# Altium PCB Booster_Common_Channel_RF.PcbDoc (part 2 of 3)
Units mm, origin at the board's own origin, x right, y up, seen from the top; angles counter-clockwise.
Board outline 159.2 x 28.7 mm, 2 copper layers (Top Layer, Bottom Layer), stack 1.071 mm thick; 192 components, 112 nets, 503 pads, 510 vias.
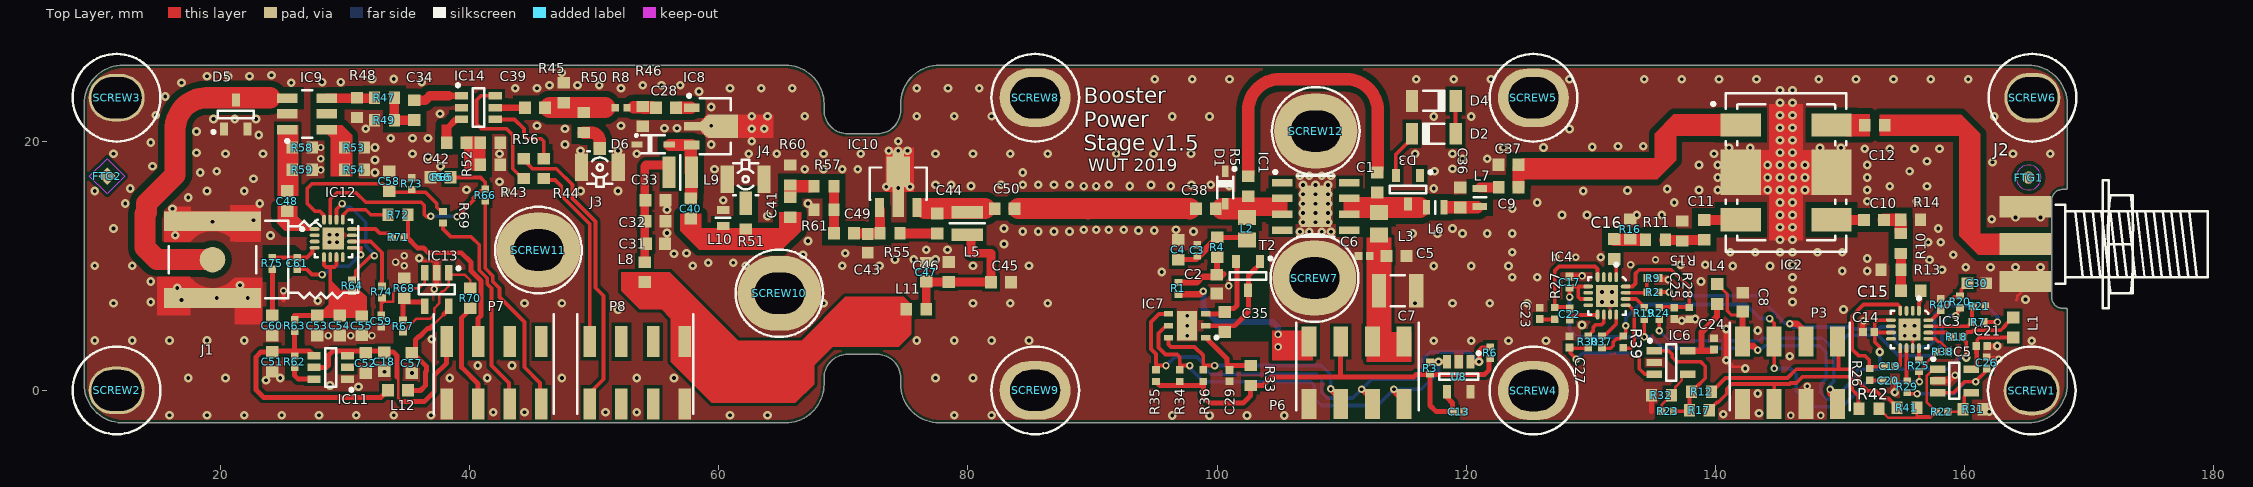
[diagram p0: Top Layer view]

## Part data (continued)
R1 R2 R7 R8 R9 R20 R21 R24 R25 R29 R30 R37 R38 R39 R40 R63 R65 R66 R69 R71 R74 R75: library part R0402_0R_JUMPER, "Resistor", Case=0402, Manufacturer=GENERIC, Manufacturer1 ComponentHeight=0.4mm, Manufacturer1 Example="YAGEO PHYCOMP", Manufacturer1 Part Number=232270591001L, Author="CERN DEM JLC", Component Type=Standard, CreateDate=03.12.2007, HelpURL=\\cern.ch\dfs\Applications\Altium\Datasheets\R0402_Phycomp_RC0402.pdf, LatestRevisionDate=17.10.2012, Manufacturer Part Number=R0402_0R_JUMPER, Mounted=Yes, Part Description="1A (0.05R Max DC Resistance) Zero Ohm Jumper", Part Number=R0402_0R_JUMPER, Pin Count=2, PressFit=No, Sense=No, SMD=Yes, Socket=No, Status="Not Recommended"
R3 R6 R18 R19 R22 R23 R28 R34 R35 R36 R62 R64 R67 R73: library part R0402_10k_1%_0.0625W_100PPM, "Resistor - 1%", Case=0402, Manufacturer=GENERIC, Manufacturer1 ComponentHeight=0.4mm, Manufacturer1 Example="YAGEO PHYCOMP", Manufacturer1 Part Number=232270671003L, Manufacturer Part Number=R0402_10K_1%_0.0625W_100PPM, Power=0.0625W, Tolerance=±1%, Author="CERN DEM JLC", Component Type=Standard, CreateDate=03.12.2007, HelpURL=\\cern.ch\dfs\Applications\Altium\Datasheets\R0402_Phycomp_RC0402.pdf, LatestRevisionDate=17.10.2012, Mounted=Yes, Part Description="General Purpose Thick Film Chip Resistor", Part Number=R0402_10K_1%_0.0625W_100PPM, Pin Count=2, PressFit=No, Sense=No, SMD=Yes, Socket=No, Status="Not Recommended", TC=±100ppm/°C
R4 R33: library part R0603_39R_1%_0.1W_100PPM, "Resistor - 1%", Case=0603, Manufacturer=GENERIC, Manufacturer1 ComponentHeight=0.55mm, Manufacturer1 Example="NIC COMPONENT", Manufacturer1 Part Number=NRC06F39R0TRF, Power=0.1W, Tolerance=±1%, Author="CERN DEM JLC", Component Type=Standard, CreateDate=03.12.2007, HelpURL=\\cern.ch\dfs\Applications\Altium\Datasheets\R0603_NIC_NRC.pdf, LatestRevisionDate=13.03.2008, Manufacturer Part Number=R0603_39R_1%_0.1W_100PPM, Mounted=Yes, Part Description="General Purpose Thick Film Chip Resistor", Part Number=R0603_39R_1%_0.1W_100PPM, Pin Count=2, PressFit=No, Sense=No, SMD=Yes, Socket=No, Status=Preferred, TC=±100ppm/°C
R5: library part R0603_750R_1%_0.1W_100PPM, "Resistor - 1%", Case=0603, Manufacturer=GENERIC, Manufacturer1 ComponentHeight=0.55mm, Manufacturer1 Example="NIC COMPONENT", Manufacturer1 Part Number=NRC06F7500TRF, Power=0.1W, Tolerance=±1%, Author="CERN DEM JLC", Component Type=Standard, CreateDate=03.12.2007, HelpURL=\\cern.ch\dfs\Applications\Altium\Datasheets\R0603_NIC_NRC.pdf, LatestRevisionDate=13.03.2008, Manufacturer Part Number=R0603_750R_1%_0.1W_100PPM, Mounted=Yes, Part Description="General Purpose Thick Film Chip Resistor", Part Number=R0603_750R_1%_0.1W_100PPM, Pin Count=2, PressFit=No, Sense=No, SMD=Yes, Socket=No, Status=Preferred, TC=±100ppm/°C
R10 R11: library part R0603_71R5_1%_0.1W_100PPM, "Resistor - 1%", Case=0603, Manufacturer=GENERIC, Manufacturer1 ComponentHeight=0.50mm, Manufacturer1 Example=VISHAY, Manufacturer1 Part Number=CRCW060371R5FKEA, Power=0.1W, Tolerance=±1%, Author="CERN DEM JLC", Component Type=Standard, CreateDate=11.12.2013, HelpURL="\\cern.ch\dfs\Applications\Altium\Datasheets\R0603_VISHAY_CRCW e3.pdf", LatestRevisionDate=11.12.2013, Manufacturer Part Number=R0603_71R5_1%_0.1W_100PPM, Mounted=Yes, Part Description="General Purpose Thick Film Chip Resistor", Part Number=R0603_71R5_1%_0.1W_100PPM, Pin Count=2, PressFit=No, Sense=No, SMD=Yes, Socket=No, Status=Preferred, TC=±100ppm/°C
R12 R42 R45 R46 R50 R51 R72: library part R0603_NO-VALUE, "Resistor", Case=0603, Author="CERN DEM JLC", Component Type=Standard, CreateDate=03.12.2007, HelpURL=Undefined, LatestRevisionDate=13.03.2008, Manufacturer=Undefined, Manufacturer1 ComponentHeight=Undefined, Manufacturer1 Example=Undefined, Manufacturer1 Part Number=Undefined, Manufacturer Part Number=R0603_NO-VALUE, Mounted=No, Part Description="Reserved Footprint For a 0603 (1608) Chip Resistor", Part Number=R0603_NO-VALUE, Pin Count=2, PressFit=No, Sense=No, SMD=Yes, Socket=No, Status=None
R13 R16: library part R0603_46R4_0.1%_0.063W_10PPM, "Resistor - 0.1%", Case=0603, Manufacturer=GENERIC, Manufacturer1 ComponentHeight=0.5mm, Manufacturer1 Example="TYCO HOLSWORTHY", Manufacturer1 Part Number=RN73C1J46R4BTDF, Power=0.063W, Tolerance=±0.1%, Author="CERN DEM JLC", Component Type=Standard, CreateDate=03.12.2007, HelpURL=\\cern.ch\dfs\Applications\Altium\Datasheets\R0603_Tyco_RN73.pdf, LatestRevisionDate=13.03.2008, Manufacturer Part Number=R0603_46R4_0.1%_0.063W_10PPM, Mounted=Yes, Part Description="Thin Film Chip Resistor", Part Number=R0603_46R4_0.1%_0.063W_10PPM, Pin Count=2, PressFit=No, Sense=No, SMD=Yes, Socket=No, Status="Not Recommended", TC=±10ppm
R14 R15: "Resistor - 0.5%", Case=0603, Manufacturer=GENERIC, Manufacturer1 ComponentHeight=0.55mm, Manufacturer1 Example=Yaego, Manufacturer1 Part Number=RT0603DRE0796R5L, Manufacturer Part Number=R0603_96R5_0.5%_0.1W_50PPM, Power=0.1W, Tolerance=±0.5%, Author=GK, Component Type=Standard, CreateDate=03.12.2007, HelpURL=\\cern.ch\dfs\Applications\Altium\Datasheets\R0603_NIC_NRC.pdf, LatestRevisionDate=13.03.2008, Mounted=Yes, Part Description="General Purpose Thick Film Chip Resistor", Part Number=R0603_96R5_0.5%_0.1W_50PPM, Pin Count=2, PressFit=No, Sense=No, SMD=Yes, Socket=No, Status=Preferred, TC=±50ppm/°C
R17 R41 R43 R44 R52 R53 R54 R56 R70: library part R0603_100R_1%_0.1W_100PPM, "Resistor - 1%", Case=0603, Manufacturer=GENERIC, Manufacturer1 ComponentHeight=0.55mm, Manufacturer1 Example="NIC COMPONENT", Manufacturer1 Part Number=NRC06F4700TRF, Power=0.1W, Tolerance=±1%, Author="CERN DEM JLC", Component Type=Standard, CreateDate=03.12.2007, HelpURL=\\cern.ch\dfs\Applications\Altium\Datasheets\R0603_NIC_NRC.pdf, LatestRevisionDate=13.03.2008, Manufacturer Part Number=R0603_100R_1%_0.1W_100PPM, Mounted=Yes, Part Description="General Purpose Thick Film Chip Resistor", Part Number=R0603_100R_1%_0.1W_100PPM, Pin Count=2, PressFit=No, Sense=No, SMD=Yes, Socket=No, Status=Preferred, TC=±100ppm/°C
R26 R27: library part R0402_3R9_1%_0.0625W_200PPM, "Resistor - 1%", Case=0402, Manufacturer=GENERIC, Manufacturer1 ComponentHeight=0.4mm, Manufacturer1 Example="YAGEO PHYCOMP", Manufacturer1 Part Number=232270673908L, Power=0.0625W, Tolerance=±1%, Author="CERN DEM JLC", Component Type=Standard, CreateDate=03.12.2007, HelpURL=\\cern.ch\dfs\Applications\Altium\Datasheets\R0402_Phycomp_RC0402.pdf, LatestRevisionDate=17.10.2012, Manufacturer Part Number=R0402_3R9_1%_0.0625W_200PPM, Mounted=Yes, Part Description="General Purpose Thick Film Chip Resistor", Part Number=R0402_3R9_1%_0.0625W_200PPM, Pin Count=2, PressFit=No, Sense=No, SMD=Yes, Socket=No, Status="Not Recommended", TC=±200ppm/°C
R31 R32 R68: library part R0603_20K_1%_0.1W_100PPM, "Resistor - 1%", Case=0603, Manufacturer=GENERIC, Manufacturer1 ComponentHeight=0.55mm, Manufacturer1 Example="NIC COMPONENT", Manufacturer1 Part Number=NRC06F2002TRF, Power=0.1W, Tolerance=±1%, Author="CERN DEM JLC", Component Type=Standard, CreateDate=03.12.2007, HelpURL=\\cern.ch\dfs\Applications\Altium\Datasheets\R0603_NIC_NRC.pdf, LatestRevisionDate=13.03.2008, Manufacturer Part Number=R0603_20K_1%_0.1W_100PPM, Mounted=Yes, Part Description="General Purpose Thick Film Chip Resistor", Part Number=R0603_20K_1%_0.1W_100PPM, Pin Count=2, PressFit=No, Sense=No, SMD=Yes, Socket=No, Status=Preferred, TC=±100ppm/°C
R47: library part R0603_30R_1%_0.1W_100PPM, "Resistor - 1%", Case=0603, Manufacturer=GENERIC, Manufacturer1 ComponentHeight=0.55mm, Manufacturer1 Example="NIC COMPONENT", Manufacturer1 Part Number=NRC06F30R0TRF, Power=0.1W, Tolerance=±1%, Author="CERN DEM JLC", Component Type=Standard, CreateDate=03.12.2007, HelpURL=\\cern.ch\dfs\Applications\Altium\Datasheets\R0603_NIC_NRC.pdf, LatestRevisionDate=13.03.2008, Manufacturer Part Number=R0603_30R_1%_0.1W_100PPM, Mounted=Yes, Part Description="General Purpose Thick Film Chip Resistor", Part Number=R0603_30R_1%_0.1W_100PPM, Pin Count=2, PressFit=No, Sense=No, SMD=Yes, Socket=No, Status=Preferred, TC=±100ppm/°C
R48 R49: library part R0603_180R_1%_0.1W_100PPM, "Resistor - 1%", Case=0603, Manufacturer=GENERIC, Manufacturer1 ComponentHeight=0.55mm, Manufacturer1 Example="NIC COMPONENT", Manufacturer1 Part Number=NRC06F1800TRF, Power=0.1W, Tolerance=±1%, Author="CERN DEM JLC", Component Type=Standard, CreateDate=03.12.2007, HelpURL=\\cern.ch\dfs\Applications\Altium\Datasheets\R0603_NIC_NRC.pdf, LatestRevisionDate=13.03.2008, Manufacturer Part Number=R0603_180R_1%_0.1W_100PPM, Mounted=Yes, Part Description="General Purpose Thick Film Chip Resistor", Part Number=R0603_180R_1%_0.1W_100PPM, Pin Count=2, PressFit=No, Sense=No, SMD=Yes, Socket=No, Status=Preferred, TC=±100ppm/°C
R55: library part R0603_1K_1%_0.1W_100PPM, "Resistor - 1%", Case=0603, Manufacturer=GENERIC, Manufacturer1 ComponentHeight=0.55mm, Manufacturer1 Example="NIC COMPONENT", Manufacturer1 Part Number=NRC06F1001TRF, Power=0.1W, Tolerance=±1%, Author="CERN DEM JLC", Component Type=Standard, CreateDate=03.12.2007, HelpURL=\\cern.ch\dfs\Applications\Altium\Datasheets\R0603_NIC_NRC.pdf, LatestRevisionDate=13.03.2008, Manufacturer Part Number=R0603_1K_1%_0.1W_100PPM, Mounted=Yes, Part Description="General Purpose Thick Film Chip Resistor", Part Number=R0603_1K_1%_0.1W_100PPM, Pin Count=2, PressFit=No, Sense=No, SMD=Yes, Socket=No, Status=Preferred, TC=±100ppm/°C
R57: library part R0603_42R2_0.1%_0.063W_10PPM, "Resistor - 0.1%", Case=0603, Manufacturer=GENERIC, Manufacturer1 ComponentHeight=0.5mm, Manufacturer1 Example="TYCO HOLSWORTHY", Manufacturer1 Part Number=RN73C1J42R2BTDF, Power=0.063W, Tolerance=±0.1%, Author="CERN DEM JLC", Component Type=Standard, CreateDate=03.12.2007, HelpURL=\\cern.ch\dfs\Applications\Altium\Datasheets\R0603_Tyco_RN73.pdf, LatestRevisionDate=13.03.2008, Manufacturer Part Number=R0603_42R2_0.1%_0.063W_10PPM, Mounted=Yes, Part Description="Thin Film Chip Resistor", Part Number=R0603_42R2_0.1%_0.063W_10PPM, Pin Count=2, PressFit=No, Sense=No, SMD=Yes, Socket=No, Status="Not Recommended", TC=±10ppm
R58 R59: library part R0603_169R_0.1%_0.063W_10PPM, "Resistor - 0.1%", Case=0603, Manufacturer=GENERIC, Manufacturer1 ComponentHeight=0.5mm, Manufacturer1 Example="TYCO HOLSWORTHY", Manufacturer1 Part Number=RN73C1J169RBTDF, Power=0.063W, Tolerance=±0.1%, Author="CERN DEM JLC", Component Type=Standard, CreateDate=03.12.2007, HelpURL=\\cern.ch\dfs\Applications\Altium\Datasheets\R0603_Tyco_RN73.pdf, LatestRevisionDate=13.03.2008, Manufacturer Part Number=R0603_169R_0.1%_0.063W_10PPM, Mounted=Yes, Part Description="Thin Film Chip Resistor", Part Number=R0603_169R_0.1%_0.063W_10PPM, Pin Count=2, PressFit=No, Sense=No, SMD=Yes, Socket=No, Status="Not Recommended", TC=±10ppm
R60 R61: library part R0603_130R_1%_0.1W_100PPM, "Resistor - 1%", Case=0603, Manufacturer=GENERIC, Manufacturer1 ComponentHeight=0.55mm, Manufacturer1 Example="NIC COMPONENT", Manufacturer1 Part Number=NRC06F1300TRF, Power=0.1W, Tolerance=±1%, Author="CERN DEM JLC", Component Type=Standard, CreateDate=03.12.2007, HelpURL=\\cern.ch\dfs\Applications\Altium\Datasheets\R0603_NIC_NRC.pdf, LatestRevisionDate=13.03.2008, Manufacturer Part Number=R0603_130R_1%_0.1W_100PPM, Mounted=Yes, Part Description="General Purpose Thick Film Chip Resistor", Part Number=R0603_130R_1%_0.1W_100PPM, Pin Count=2, PressFit=No, Sense=No, SMD=Yes, Socket=No, Status=Preferred, TC=±100ppm/°C
SCREW1 SCREW2 SCREW3 SCREW4 SCREW5 SCREW6 SCREW7 SCREW8 SCREW9 SCREW10 SCREW11 SCREW12: library part BOSSARD_BN5687-3061605_v, "Screw", Manufacturer=BOSSARD, Manufacturer Part Number="BN5687 Art.3061605", Author="CERN DEM JLC", Component Type=Mechanical, ComponentHeight=2.4mm, CreateDate=15/01/2013, HelpURL=\\cern.ch\dfs\Applications\Altium\Datasheets\BOSSARD_BN5687-3061605.pdf, LatestRevisionDate=15/01/2013, Mounted=Yes, PackageDescription="M3 L=6mm Hexalobular Socket Pan Head Screw, Fully Threaded - Stainless Steel A2", Part Description="M3 L=6mm Hexalobular Socket Pan Head Screw, Fully Threaded, Stainless Steel A2", Part Number=BOSSARD_BN5687-3061605_v, Pin Count=0, PressFit=No, Sense=No, SMD=No, Socket=No, Status=None
T2: "PNP Transistor", Case=SOT23-3, Manufacturer="ON SEMICONDUCTOR", Author="CERN DEM JLC", Bonding=No, ComponentHeight=1.1mm, Component Type=Standard, CreateDate=29.03.2012, Device=MMBT3906LT1G, HelpURL=\\cern.ch\dfs\Applications\Altium\Datasheets\MMBT3906LT1G.pdf, LatestRevisionDate=29.03.2012, Manufacturer Part Number=MMBT3906LT1G, Mounted=Yes, PackageDescription="SOT23 3-Leads, Pitch 0.95mm - Body 1.4x3mm, IPC Medium Density", Part Description="40V 200mA PNP General Purpose Transistor", Part Number=MMBT3906LT1G, Pin Count=3, PressFit=No, Sense=No, SMD=Yes, Socket=No
U8: library part 24AA01H, "1K I2  C™ Serial EEPROM with Half-Array Write-Protect", Manufacturer=Microchip, Manufacturer Part Number=-, Supplier Part Number 1=579-24AA01HTILT, Generic=no, Mounting type=SMT, Package=-, Remarks=-, Supplier 1=Mouser, Supplier 2=Farnell, Supplier 3=Digikey, Supplier Part Number 2=-, Supplier Part Number 3=24AA01HT-I/LTCT-ND

## Free pads (board coordinates)
  oval 4.5x3.8 hole 3.3 slot 4 at 0 deg mask+1: 0(11.65,-0.02) 1(11.65,23.48)
  oval 4.5x4 hole 3.3 slot 4 at 0 deg mask+0.9: 1(165.4,-0.03) 2(165.46,23.48)
  oval 5.7x4.7 hole 3.3 slot 4 at 0 deg mask+0.6: 2(85.4,-0.02) 3(85.4,23.48) 6(125.4,-0.03) 7(125.4,23.47)
  oval 6.7x6 hole 3.3 slot 4 at 0 deg: 4(45.52,11.25) 4(107.82,9) 5(64.86,7.78) 5(107.92,20.8)

## Via types
v1: diameter 0.7, hole 0.3, Top Layer to Bottom Layer, tented both sides, 450 vias
v2: diameter 0.6, hole 0.3, Top Layer to Bottom Layer, tented both sides, 60 vias

## Nets (pads, with @x,y where several pads share a name; then routed paths per layer and width w, separated by ;. In a path a pad name is that pad's centre, name@x,y a point inside that pad or via, vN(x,y) a via of type N, cw(c..) or ccw(c..) an arc to the next point about the centre after c; other vN are vias at no path point)
ADL_Q: P7.6 R71.1 R72.2 | length 14.6
  Top Layer w0.3: 35.05,12.28 R72.2@35.05,14.08
  Top Layer w0.4: R71.1@35,12.23 35.8,11.43 36.293,11.43 36.4,11.323 36.693,11.03 39.33,11.03 40.116,10.244 40.116,9.562 40.902,8.776 40.902,5.984 40.68,5.762 P7.6@40.68,3.98 ; P7.6@40.38,3.78 P7.6@40.38,3.98
ADL_RST: P7.1 R66.1 | length 18
  Top Layer w0.3: R66.1@41.25,15.19 41.25,9.779 41.857,9.171 41.857,8.719 42.4,8.176 42.4,7.48 44.4,5.48 44.4,1.83 45.65,0.58 P7.1@45.65,-1.03
ADL_VREF: P7.3 R69.1 | length 17.5
  Top Layer w0.3: R69.1@37.85,13.398 37.85,12.945 38.49,12.305 40.125,12.305 40.765,11.665 40.765,9.624 41.405,8.984 41.405,8.532 41.75,8.187 41.75,1.98 43.15,0.58 P7.3@43.15,-0.99
ALERT: IC7.6 P6.5 R36.2 | length 17.3
  Top Layer w0.3: IC7.6@96.1,4.23 96.1,3.67 96.297,3.473 98.197,3.473 98.9,2.77 98.9,1.97 v2(99.8,1.97) ; v2(109.13,0.1) 109.13,-0.06 P6.5@109.8,-0.73
  Bottom Layer w0.3: v2(99.8,1.97) 108.4,1.97 109.13,1.24 v2(109.13,0.1)
FWD_Q: P3.6 R25.1 R37.1 R38.1 R39.1 | length 38
  Top Layer w0.203: R25.1@156.35,1.49 156.385,1.455 v2(156.385,0.67) ; R25.1@156.5,1.49 156.5,1.62 156.971,2.091 156.971,2.221 157.809,3.06 R38.1@157.809,3.08
  Top Layer w0.3: R37.1@130.9,3.37 131.6,3.37 131.8,3.57 131.8,3.856 132.064,4.12 132.35,4.12 132.8,4.57 v2(132.8,5.17) ; v2(144.356,5.746) 144.728,5.374 144.728,3.572 144.73,3.57 v2(144.73,1.74) ; v2(156.385,0.67) v2@156.443,0.727
  Bottom Layer w0.3: v2(132.8,5.17) 132.8,5.77 133.9,6.87 142.46,6.87 143.584,5.746 v2(144.356,5.746) ; v2(144.73,1.74) 146.03,1.74 146.5,1.27 146.5,-0.13 147.7,-1.33 150.2,-1.33 152.2,0.67 v2(156.385,0.67)
FWD_RST: P3.4 R2.2 R7.2 | length 35.8
  Top Layer w0.3: R2.2@135.5,7.87 v2(136.3,7.87) ; 161.9,5.47 v2(162.65,5.47)
  Top Layer w0.5: v2(145.97,5.33) 146.567,5.33 146.92,4.977 146.92,4.48 P3.4@147.3,4.1
  Bottom Layer w0.3: v2(136.3,7.87) 136.6,7.57 143.4,7.57 145.64,5.33 v2(145.97,5.33) 146.229,5.07 150.951,5.07 151.106,4.915 153.094,4.915 153.249,5.07 154,5.07 154.4,4.67 154.4,3.97 154.9,3.47 157.1,3.47 157.6,3.97 157.6,6.07 158.3,6.77 161.8,6.77 162.65,5.92 v2(162.65,5.47)